# EAGLE board CT_schematic (EAGLE 7.6.0)

Size 100 x 80 mm. Coordinates in mm from the lower left corner, seen from the top.
Outline: 0,0 100,0 100,80 0,80 0,0
Copper layers (1*16): Top 0.035mm / dielectric 1.5mm / Bottom 0.035mm
Design rules "default": minimum track width 10mil, minimum drill 24mil, track to track 8mil, track to pad 8mil, pad to pad 8mil, via to via 8mil, smd to smd 8mil, copper to edge 40mil, drill to drill 8mil, minimum pad ring 10mil, minimum via ring 8mil, stop-mask expansion 4mil, vias tented up to drill 0mil, thermal gap 10mil

## Footprints (pad centres in the part's own frame; a part is rotated, then mirrored left to right if it is on the bottom)
C0603 = smd 0.8 x 0.8: 1 -0.762,0; 2 0.762,0
C0402 = smd 0.5 x 0.5: 1 -0.508,0; 2 0.508,0
2220 = smd 1.85 x 5.5: 1 -2.55,0; 2 2.55,0
C1210 = smd 1.2 x 2.5: 1 -1.524,0; 2 1.524,0
C1206 = smd 1.3 x 1.6: 1 -1.524,0; 2 1.524,0
L0603 = smd 0.8 x 0.8: 1 -0.762,0; 2 0.762,0
R0603 = smd 0.8 x 0.8: 1 -0.762,0; 2 0.762,0
LQFP100 = smd 0.3 x 1.2: 1 -6,-7.75; 2 -5.5,-7.75; 3 -5,-7.75; 4 -4.5,-7.75; 5 -4,-7.75; 6 -3.5,-7.75; 7 -3,-7.75; 8 -2.5,-7.75; 9 -2,-7.75; 10 -1.5,-7.75; 11 -1,-7.75; 12 -0.5,-7.75; 13 0,-7.75; 14 0.5,-7.75; 15 1,-7.75; 16 1.5,-7.75; 17 2,-7.75; 18 2.5,-7.75; 19 3,-7.75; 20 3.5,-7.75; 21 4,-7.75; 22 4.5,-7.75; 23 5,-7.75; 24 5.5,-7.75; 25 6,-7.75; 51 6,7.75; 52 5.5,7.75; 53 5,7.75; 54 4.5,7.75; 55 4,7.75; 56 3.5,7.75; 57 3,7.75; 58 2.5,7.75; 59 2,7.75; 60 1.5,7.75; 61 1,7.75; 62 0.5,7.75; 63 0,7.75; 64 -0.5,7.75; 65 -1,7.75; 66 -1.5,7.75; 67 -2,7.75; 68 -2.5,7.75; 69 -3,7.75; 70 -3.5,7.75; 71 -4,7.75; 72 -4.5,7.75; 73 -5,7.75; 74 -5.5,7.75; 75 -6,7.75 | smd 1.2 x 0.3: 26 7.75,-6; 27 7.75,-5.5; 28 7.75,-5; 29 7.75,-4.5; 30 7.75,-4; 31 7.75,-3.5; 32 7.75,-3; 33 7.75,-2.5; 34 7.75,-2; 35 7.75,-1.5; 36 7.75,-1; 37 7.75,-0.5; 38 7.75,0; 39 7.75,0.5; 40 7.75,1; 41 7.75,1.5; 42 7.75,2; 43 7.75,2.5; 44 7.75,3; 45 7.75,3.5; 46 7.75,4; 47 7.75,4.5; 48 7.75,5; 49 7.75,5.5; 50 7.75,6; 76 -7.75,6; 77 -7.75,5.5; 78 -7.75,5; 79 -7.75,4.5; 80 -7.75,4; 81 -7.75,3.5; 82 -7.75,3; 83 -7.75,2.5; 84 -7.75,2; 85 -7.75,1.5; 86 -7.75,1; 87 -7.75,0.5; 88 -7.75,0; 89 -7.75,-0.5; 90 -7.75,-1; 91 -7.75,-1.5; 92 -7.75,-2; 93 -7.75,-2.5; 94 -7.75,-3; 95 -7.75,-3.5; 96 -7.75,-4; 97 -7.75,-4.5; 98 -7.75,-5; 99 -7.75,-5.5; 100 -7.75,-6
TST-110-05-T-D-RA = drill 1 pad 1.7 square: 1 0,0 | drill 1 pad 1.7: 2 0,2.54; 3 2.54,0; 4 2.54,2.54; 5 5.08,0; 6 5.08,2.54; 7 7.62,0; 8 7.62,2.54; 9 10.16,0; 10 10.16,2.54; 11 12.7,0; 12 12.7,2.54; 13 15.24,0; 14 15.24,2.54; 15 17.78,0; 16 17.78,2.54; 17 20.32,0; 18 20.32,2.54; 19 22.86,0; 20 22.86,2.54
QFN-32 = smd 0.6 x 0.3: 1 -2.3,1.75; 2 -2.3,1.25; 3 -2.3,0.75; 4 -2.3,0.25; 5 -2.3,-0.25; 6 -2.3,-0.75; 7 -2.3,-1.25; 8 -2.3,-1.75; 17 2.3,-1.75; 18 2.3,-1.25; 19 2.3,-0.75; 20 2.3,-0.25; 21 2.3,0.25; 22 2.3,0.75; 23 2.3,1.25; 24 2.3,1.75 | smd 0.3 x 0.6: 9 -1.75,-2.3; 10 -1.25,-2.3; 11 -0.75,-2.3; 12 -0.25,-2.3; 13 0.25,-2.3; 14 0.75,-2.3; 15 1.25,-2.3; 16 1.75,-2.3; 25 1.75,2.3; 26 1.25,2.3; 27 0.75,2.3; 28 0.25,2.3; 29 -0.25,2.3; 30 -0.75,2.3; 31 -1.25,2.3; 32 -1.75,2.3 | smd 3.2 x 3.2: EXP 0,0
SJ-43515TS-SMT-TR = smd 2.2 x 3: 1 0.6,-7.4; 4 3.4,-7.4 | smd 3 x 3: 2 12.8,-7.4; 5 17,-3 | smd 2 x 3: 3 5.3,0; 6 2.5,0 | drill 1.8: P$7 4.5,-3.69; P$8 11.54,-3.69
WM-64PC = drill 0.6 pad 1: 1 -1,0.95; 2 -1,-0.95
WFDN-8 = smd 0.48 x 0.7: 1 0,0; 2 1.27,0; 3 2.54,0; 4 3.81,0; 5 3.81,4.45; 6 2.54,4.45; 7 1.27,4.45; 8 0,4.45 | smd 4 x 3: 9 1.89,2.25
FCI_10118193-0001LF = smd 0.4 x 1.35: 1 -1.3,2.675; 2 -0.65,2.675; 3 0,2.675; 4 0.65,2.675; 5 1.3,2.675 | smd 1.6 x 1.4: 6 -3.2,2.45; 7 3.2,2.45 | smd 1.9 x 1.9: 8 -1.2,0; 9 1.2,0 | hole 0.5: -3.3,0; 3.3,0
SOT143B = smd 1 x 0.7: 1 -0.75,-1 | smd 0.6 x 0.7: 2 0.95,-1; 3 0.95,1; 4 -0.95,1
ASEK = smd 1.4 x 1: 1 -1.1,-0.8; 2 1.1,-0.8; 3 1.1,0.8; 4 -1.1,0.8
ASFL1 = smd 1.7 x 1.5: 1 -1.27,-1.1; 2 1.27,-1.1; 3 1.27,1.1; 4 -1.27,1.1
MSOP-8_EP = smd 1.422 x 0.508: 1 -2.095,0.975; 2 -2.095,0.325; 3 -2.095,-0.325; 4 -2.095,-0.975; 5 2.095,-0.975; 6 2.095,-0.325; 7 2.095,0.325; 8 2.095,0.975 | smd 1.727 x 1.702: EPAD 0,0
SOIC-8_EP = smd 1.6 x 0.533: 1 -2.921,1.905; 2 -2.921,0.635; 3 -2.921,-0.635; 4 -2.921,-1.905; 5 2.921,-1.905; 6 2.921,-0.635; 7 2.921,0.635; 8 2.921,1.905 | smd 2.54 x 3.302: EPAD 0,0 | drill 0.406 pad 0.406: P$1 -0.508,0.635; P$2 0.381,0.635; P$3 -0.508,-0.635; P$4 0.381,-0.635
DFN8_2X3MC = smd 0.813 x 0.305: 1 -1.398,0.75; 2 -1.398,0.25; 3 -1.398,-0.25; 4 -1.398,-0.75; 5 1.398,-0.75; 6 1.398,-0.25; 7 1.398,0.25; 8 1.398,0.75 | smd 1.753 x 1.549: 9 0,0
JST-2-SMD = smd 1 x 4.6: 1 -1,-3.7; 2 1,-3.7 | smd 1.6 x 3.4: NC1 -3.4,1.5; NC2 3.4,1.5
SON-6 = smd 0.55 x 0.3: 1 -0.355,0.5 | smd 0.52 x 0.3: 2 -0.37,0; 3 -0.37,-0.5; 4 0.37,-0.5; 5 0.37,0; 6 0.37,0.5
SW_4-1437565-2 = smd 1.4 x 2.1: 1 -2.23,4.55; 2 -2.23,-4.55; 3 2.23,4.55; 4 2.23,-4.55
LGM67K-G1J2-24-Z = smd 0.8 x 1.4: A -2,0; C 0,0
NC7SZ125M5X = smd 1.3 x 0.7: 1 -1.3,0.95; 2 -1.3,0; 3 -1.3,-0.95; 4 1.3,-0.95; 5 1.3,0.95

## Placement (x,y rotation side)
C1  1e-06  [C0603]  -35.56,80.01 0 top  (outside the outline)
C2  1e-07  [C0603]  -39.37,80.01 0 top  (outside the outline)
C3  1e-07  [C0603]  -43.18,80.01 0 top  (outside the outline)
C4  1e-07  [C0603]  -46.99,80.01 0 top  (outside the outline)
C5  1e-07  [C0603]  -50.8,80.01 0 top  (outside the outline)
C6  1e-07  [C0603]  -54.61,80.01 0 top  (outside the outline)
C7  1e-07  [C0603]  -58.42,80.01 0 top  (outside the outline)
C8  4.7e-06  [C0603]  -24.13,80.01 0 top  (outside the outline)
C9  2.2e-06  [C0603]  -27.94,80.01 0 top  (outside the outline)
C10  2.2e-06  [C0603]  -31.75,80.01 0 top  (outside the outline)
C11  1e-08  [C0603]  -62.23,80.01 0 top  (outside the outline)
C12  1e-06  [C0603]  -66.04,80.01 0 top  (outside the outline)
C13  1e-06  [C0603]  -69.85,80.01 0 top  (outside the outline)
C14  1e-07  [C0402]  -72.39,85.09 0 top  (outside the outline)
C15  1e-06  [C0603]  -73.66,80.01 0 top  (outside the outline)
C16  1e-06  [C0603]  -77.47,80.01 0 top  (outside the outline)
C17  1e-06  [C0603]  -81.28,80.01 0 top  (outside the outline)
C18  1e-06  [C0603]  -15.24,85.09 0 top  (outside the outline)
C19  1e-06  [C0603]  -19.05,85.09 0 top  (outside the outline)
C20  1e-06  [C0603]  -22.86,85.09 0 top  (outside the outline)
C21  1e-06  [C0603]  -26.67,85.09 0 top  (outside the outline)
C22  1e-07  [C0402]  -76.2,85.09 0 top  (outside the outline)
C23  1e-07  [C0402]  -80.01,85.09 0 top  (outside the outline)
C24  1e-07  [C0402]  -15.24,90.17 0 top  (outside the outline)
C25  1e-07  [C0402]  -19.05,90.17 0 top  (outside the outline)
C26  1e-06  [C0603]  -30.48,85.09 0 top  (outside the outline)
C27  1e-07  [C0402]  -22.86,90.17 0 top  (outside the outline)
C28  1e-08  [C0402]  -26.67,90.17 0 top  (outside the outline)
C29  1e-08  [C0402]  -30.48,90.17 0 top  (outside the outline)
C30  1e-08  [C0402]  -34.29,90.17 0 top  (outside the outline)
C31  6.8e-05  [2220]  -31.75,49.53 0 top  (outside the outline)
C32  1e-06  [C0603]  -34.29,85.09 0 top  (outside the outline)
C33  6.8e-05  [2220]  -39.37,49.53 0 top  (outside the outline)
C34  1e-05  [C1210]  -38.1,67.31 0 top  (outside the outline)
C35  1e-05  [C1210]  -44.45,67.31 0 top  (outside the outline)
C36  1e-05  [C1210]  -50.8,67.31 0 top  (outside the outline)
C37  1e-05  [C1210]  -57.15,67.31 0 top  (outside the outline)
C38  1e-07  [C0402]  -38.1,90.17 0 top  (outside the outline)
C39  1e-05  [C1206]  -63.5,67.31 0 top  (outside the outline)
C40  1e-05  [C1206]  -69.85,67.31 0 top  (outside the outline)
C41  1e-08  [C0402]  -41.91,90.17 0 top  (outside the outline)
C42  1e-08  [C0402]  -45.72,90.17 0 top  (outside the outline)
F1  240.0  [L0603]  -38.1,85.09 0 top  (outside the outline)
R2  1000.0  [R0603]  -41.91,85.09 0 top  (outside the outline)
R4  4700.0  [R0603]  -45.72,85.09 0 top  (outside the outline)
R5  10000.0  [R0603]  -62.23,73.66 0 top  (outside the outline)
R6  10000.0  [R0603]  -67.31,73.66 0 top  (outside the outline)
R7  1270.0  [R0603]  -49.53,85.09 0 top  (outside the outline)
R8  1270.0  [R0603]  -53.34,85.09 0 top  (outside the outline)
R9  100000.0  [R0603]  -36.83,73.66 0 top  (outside the outline)
R10  100000.0  [R0603]  -41.91,73.66 0 top  (outside the outline)
R11  100000.0  [R0603]  -46.99,73.66 0 top  (outside the outline)
R12  3900.0  [R0603]  -57.15,85.09 0 top  (outside the outline)
R13  2200.0  [R0603]  -60.96,85.09 0 top  (outside the outline)
R14  10000.0  [R0603]  -72.39,73.66 0 top  (outside the outline)
R15  4031.5447154472  [R0603]  -31.75,73.66 0 top  (outside the outline)
R16  2200.0  [R0603]  -64.77,85.09 0 top  (outside the outline)
R17  10000.0  [R0603]  -77.47,73.66 0 top  (outside the outline)
R18  10000.0  [R0603]  -82.55,73.66 0 top  (outside the outline)
R19  82000.0  [R0603]  -15.24,80.01 0 top  (outside the outline)
R20  300000.0  [R0603]  -52.07,73.66 0 top  (outside the outline)
R21  120000.0  [R0603]  -57.15,73.66 0 top  (outside the outline)
R22  2000.0  [R0603]  -68.58,85.09 0 top  (outside the outline)
R23  10000.0  [R0603]  -20.32,80.01 0 top  (outside the outline)
U1  STM32F756VGT6  [LQFP100]  -24.13,8.89 0 top  (outside the outline)
U2  TST-110-05-T-D-RA  [TST-110-05-T-D-RA]  -58.42,55.88 0 top  (outside the outline)
U3  SGTL5000XNAA3  [QFN-32]  -22.86,49.53 0 top  (outside the outline)
U4  SJ-43515TS-SMT-TR  [SJ-43515TS-SMT-TR]  -59.69,10.16 0 top  (outside the outline)
U5  SJ-43515TS-SMT-TR  [SJ-43515TS-SMT-TR]  -39.37,26.67 0 top  (outside the outline)
U6  SJ-43515TS-SMT-TR  [SJ-43515TS-SMT-TR]  -67.31,26.67 0 top  (outside the outline)
U7  WM-64PCT  [WM-64PC]  -74.93,36.83 0 top  (outside the outline)
U8  SST26WF016B-104I/MF  [WFDN-8]  -66.04,34.29 0 top  (outside the outline)
U9  10118193-0001LF  [FCI_10118193-0001LF]  -19.05,58.42 0 top  (outside the outline)
U10  prtr5v0u2ax  [SOT143B]  -58.42,90.17 0 top  (outside the outline)
U11  ASEK-32.768KHz-ECST  [ASEK]  -77.47,58.42 0 top  (outside the outline)
U12  ASFL-24.57MHZ-NCS  [ASFL1]  -58.42,48.26 0 top  (outside the outline)
U13  ASFL1-25MHZ-NCS  [ASFL1]  -74.93,48.26 0 top  (outside the outline)
U14  MIC47100YMME  [MSOP-8_EP]  -76.2,66.04 0 top  (outside the outline)
U15  MIC5234YME  [SOIC-8_EP]  -17.78,67.31 0 top  (outside the outline)
U16  MCP73831T-2ACI/MC  [DFN8_2X3MC]  -68.58,88.9 0 top  (outside the outline)
U17  S2B-PH-SM4-TB(LF)(SN)  [JST-2-SMD]  -41.91,38.1 0 top  (outside the outline)
U18  TPS3895ADRYR  [SON-6]  -62.23,88.9 0 top  (outside the outline)
U19  4-1437565-2  [SW_4-1437565-2]  -27.94,38.1 0 top  (outside the outline)
U20  Q65110A2395  [LGM67K-G1J2-24-Z]  -26.67,67.31 0 top  (outside the outline)
U21  nc7sz125m5x  [NC7SZ125M5X]  -15.24,73.66 0 top  (outside the outline)
U22  nc7sz125m5x  [NC7SZ125M5X]  -21.59,73.66 0 top  (outside the outline)

## Library data of the parts
C1-C42 F1 R2 R4-R23 U1-U22 = circuit_tree

## Nets
CLK_U1_8: U1.8 U11.3
CLK_U1_12: U1.12 U13.3
CLK_U3_21: U3.21 U12.3
GND: C1.2 C2.2 C3.2 C4.2 C5.2 C6.2 C7.2 C8.2 C9.2 C10.2 C11.2 C12.2 C13.2 C14.2 C22.2 C23.2 C24.2 C25.2 C26.2 C27.2 C28.2 C29.2 C30.2 C31.2 C32.2 C33.2 C34.2 C35.2 C36.2 C37.2 C38.2 C39.2 C40.2 C41.2 C42.2 R2.2 R5.2 R8.2 R13.2 R16.2 R19.2 R21.2 R22.2 U1.10 U1.19 U1.26 U1.49 U1.70 U1.74 U1.99 U2.4 U2.6 U2.8 U2.10 U2.12 U2.14 U2.16 U2.18 U2.20 U3.1 U3.3 U3.7 U3.EXP U5.1 U6.1 U7.2 U8.4 U8.9 U9.5 U9.6 U9.7 U9.8 U9.9 U10.1 U11.2 U12.2 U13.2 U14.3 U14.EPAD U15.7 U15.EPAD U16.6 U16.9 U17.2 U18.2 U20.C U21.2 U21.3 U22.1 U22.3
INPUT_USBPOWER_5V: C13.1 C39.1 R23.2 U1.68 U9.1 U10.4 U16.1 U16.2
NET_U1_14: R4.1 U1.14 U22.4
NET_U1_21: C11.1 C12.1 F1.1 U1.20 U1.21
NET_U1_48: C9.1 U1.48
NET_U1_73: C10.1 U1.73
NET_U1_94: R5.1 U1.94
NET_U1_97: U20.A
NET_U1_98: U19.3 U19.4
NET_U3_10: C25.1 U3.10
NET_U3_29: R7.1 U3.29
NET_U3_31: R8.1 U3.31
NET_U4_1: U3.4 U4.1
NET_U4_2: U3.2 U4.2
NET_U4_5: U3.6 U4.5
NET_U5_2: C16.1 U5.2
NET_U5_5: C15.1 U5.5
NET_U5_11: C16.2
NET_U5_12: C15.2
NET_U6_2: C18.1 C19.1 U6.2
NET_U6_5: C17.1 U6.5
NET_U6_13: C18.2 C19.2
NET_U6_14: C17.2
NET_U7_1: C20.1 C21.1 C26.1 U3.16 U7.1
NET_U7_15: C20.2 C21.2
NET_U14_6: R12.2 R13.1 U14.6
NET_U15_4: R15.2 R16.1 U15.4
NET_U16_5: R23.1 U16.5
NET_U16_8: R22.1 U16.8
NET_U18_1: R18.1 R19.1 U18.1
NET_U18_3: R20.2 R21.1 U18.3
NET_U18_4: R17.1 U18.4 U21.4 U22.2
NET_U19_1: R2.1 U19.1 U19.2
PROC_I2S1_CK: U1.29 U3.24
PROC_I2S1_SD: U1.31 U3.26
PROC_I2S1_WS: U1.28 U3.23
PROC_QUADSPI_BK1_IO0: U1.58 U8.5
PROC_QUADSPI_BK1_IO1: U1.59 U8.2
PROC_QUADSPI_BK1_IO2: R10.1 U1.1 U8.3
PROC_QUADSPI_BK1_IO3: R11.1 U1.23 U8.7
PROC_QUADSPI_BK1_NCS: R9.1 U1.92 U8.1
PROC_QUADSPI_CLK: U1.36 U8.6
PROC_SYS_JTCK_SWCLK: U1.76 U2.9
PROC_SYS_JTDO_SWO: U1.89 U2.13
PROC_SYS_JTMS_SWDIO: U1.72 U2.7
PROC_USB_OTG_FS_DM: U1.70 U9.2 U10.3
PROC_USB_OTG_FS_DP: U1.71 U9.3 U10.2
RST_OUT_U2_SRESET_B: R6.1 U2.15 U21.1
VCC_S1_3V7: C31.1 C32.1 C34.1 C35.1 C40.1 R14.1 R14.2 U14.1 U14.2 U14.4 U14.5 U15.5 U15.8 U16.3 U16.4 U17.1
VCC_TIER1_1V8: C1.1 C2.1 C3.1 C4.1 C5.1 C6.1 C7.1 C8.1 C14.1 C22.1 C23.1 C24.1 C27.1 C33.1 C38.1 C41.1 C42.1 F1.2 R4.2 R6.2 R7.2 R9.2 R10.2 R11.2 R12.1 R17.2 R18.2 R20.1 U1.6 U1.11 U1.27 U1.50 U1.75 U1.100 U2.1 U3.5 U3.20 U3.30 U8.8 U14.7 U14.8 U18.6 U21.5 U22.5
VCC_TIER1_3V3: C28.1 C29.1 C30.1 C36.1 C37.1 R15.1 U11.4 U12.4 U13.4 U15.1

## Tracks (layer width: path | path; a pad name or v marks a point on that pad's centre or on a via)
CLK_U1_8  (1 unrouted)
CLK_U1_12  (1 unrouted)
CLK_U3_21  (1 unrouted)
GND  (89 unrouted)
INPUT_USBPOWER_5V  (7 unrouted)
NET_U1_14  (2 unrouted)
NET_U1_21  (4 unrouted)
NET_U1_48  (1 unrouted)
NET_U1_73  (1 unrouted)
NET_U1_94  (1 unrouted)
NET_U1_98  (1 unrouted)
NET_U3_10  (1 unrouted)
NET_U3_29  (1 unrouted)
NET_U3_31  (1 unrouted)
NET_U4_1  (1 unrouted)
NET_U4_2  (1 unrouted)
NET_U4_5  (1 unrouted)
NET_U5_2  (1 unrouted)
NET_U5_5  (1 unrouted)
NET_U6_2  (2 unrouted)
NET_U6_5  (1 unrouted)
NET_U6_13  (1 unrouted)
NET_U7_1  (4 unrouted)
NET_U7_15  (1 unrouted)
NET_U14_6  (2 unrouted)
NET_U15_4  (2 unrouted)
NET_U16_5  (1 unrouted)
NET_U16_8  (1 unrouted)
NET_U18_1  (2 unrouted)
NET_U18_3  (2 unrouted)
NET_U18_4  (3 unrouted)
NET_U19_1  (2 unrouted)
PROC_I2S1_CK  (1 unrouted)
PROC_I2S1_SD  (1 unrouted)
PROC_I2S1_WS  (1 unrouted)
PROC_QUADSPI_BK1_IO0  (1 unrouted)
PROC_QUADSPI_BK1_IO1  (1 unrouted)
PROC_QUADSPI_BK1_IO2  (2 unrouted)
PROC_QUADSPI_BK1_IO3  (2 unrouted)
PROC_QUADSPI_BK1_NCS  (2 unrouted)
PROC_QUADSPI_CLK  (1 unrouted)
PROC_SYS_JTCK_SWCLK  (1 unrouted)
PROC_SYS_JTDO_SWO  (1 unrouted)
PROC_SYS_JTMS_SWDIO  (1 unrouted)
PROC_USB_OTG_FS_DM  (2 unrouted)
PROC_USB_OTG_FS_DP  (2 unrouted)
RST_OUT_U2_SRESET_B  (2 unrouted)
VCC_S1_3V7  (15 unrouted)
VCC_TIER1_1V8  (43 unrouted)
VCC_TIER1_3V3  (9 unrouted)